# Altium PCB Jlink-OB.PcbDoc
Units mm, origin at the board's own origin, x right, y up, seen from the top; angles counter-clockwise.
Board outline 43.05 x 18 mm, 2 copper layers (Top Layer, Bottom Layer); 27 components, 30 nets, 129 pads, 22 vias.
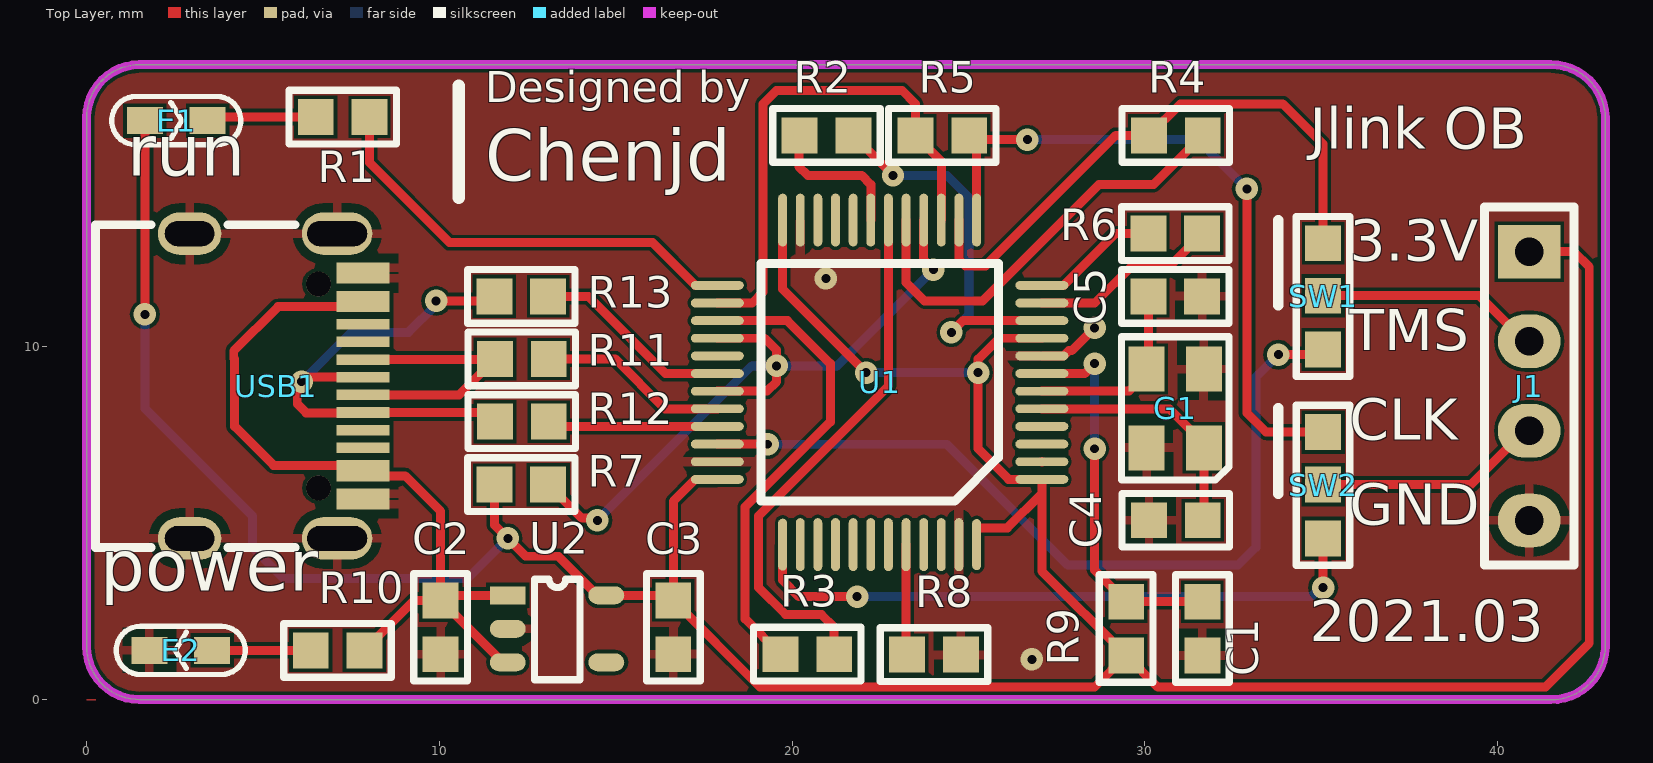
[diagram p0: Top Layer view]
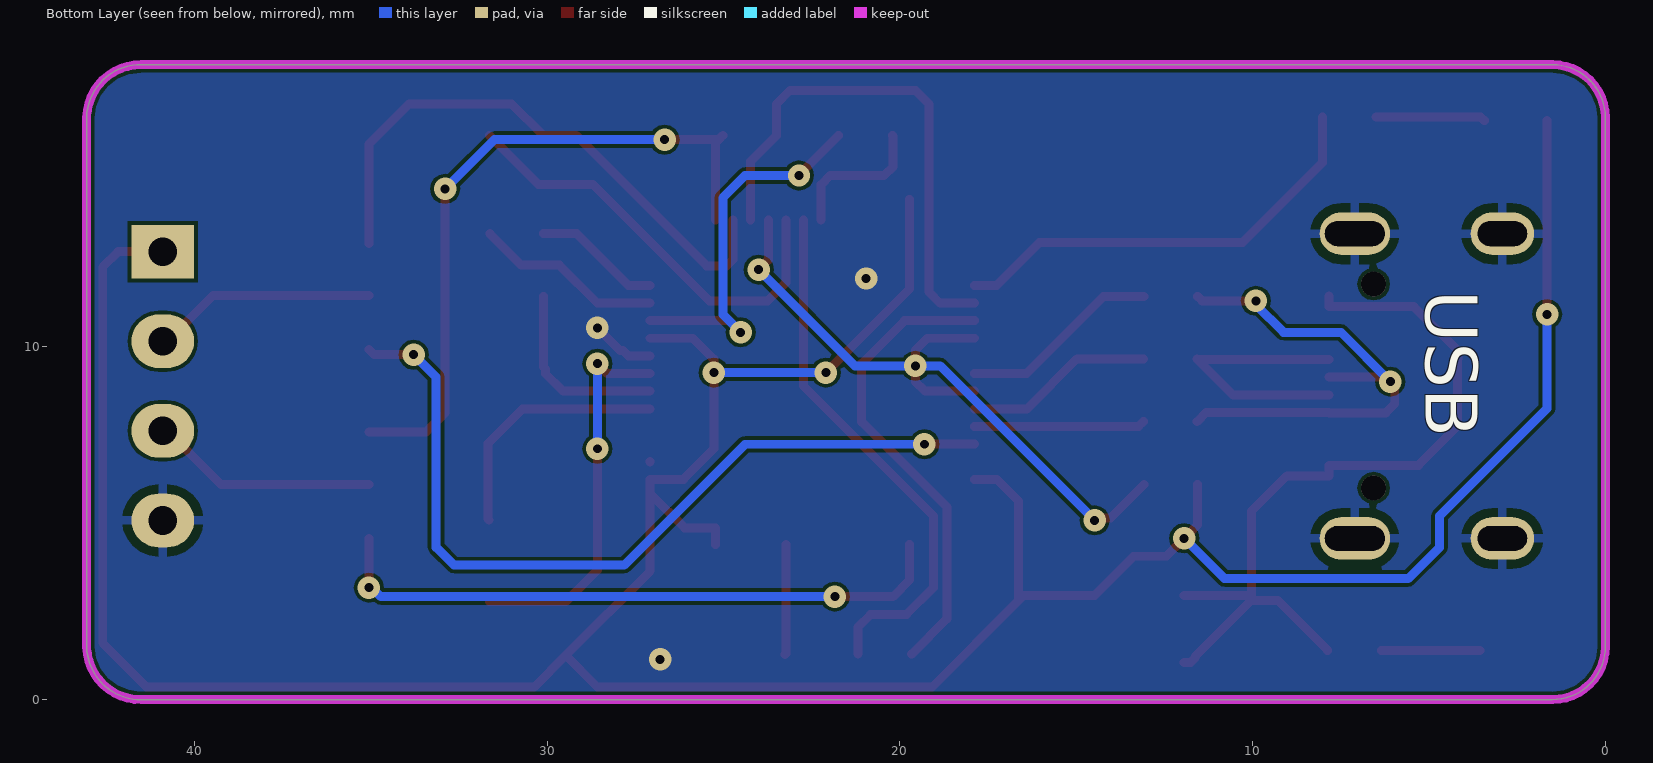
[diagram p1: Bottom Layer view, seen from below]
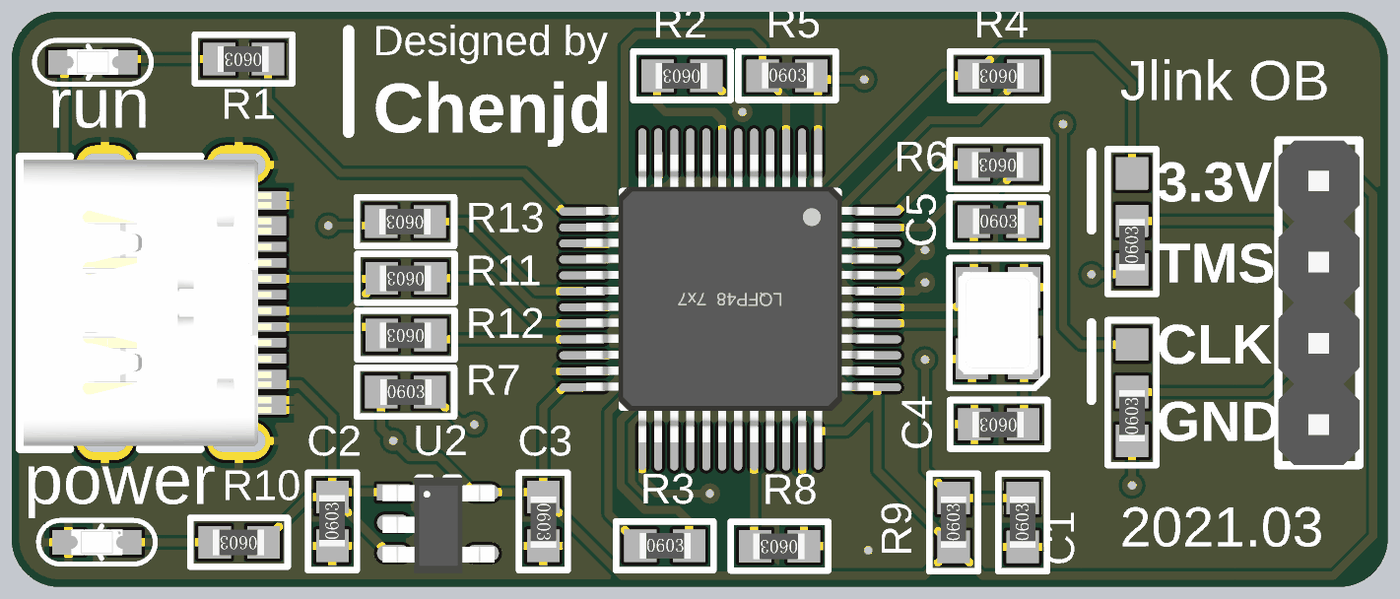
[diagram p2: 3D render of the assembled board from above, using the file's embedded part models]

## Layer stack, top to bottom
Top Solder: solder mask 0.0102, Solder Resist, Dk 3.5
Top Layer: signal copper 0.0356
Dielectric 1: dielectric 0.32, FR-4, Dk 4.8
Bottom Layer: signal copper 0.0356
Bottom Solder: solder mask 0.0102, Solder Resist, Dk 3.5

## Board outline
0,1.5 ccw(c1.5,1.5) 1.5,0 41.5,0 ccw(c41.526,1.526) 43.053,1.5 43.053,16.5 ccw(c41.527,16.474) 41.5,18 1.5,18 ccw(c1.5,16.5) 0,16.5

## Design rules (kind name [scope] priority, off if disabled: settings)
Clearance [All] p1: gap=0.1 ignorepadtopadclearanceinfootprint=FALSE
PolygonConnect [All] p1: connectstyle=Relief reliefconductorwidth=0.254 reliefentries=4 polygonreliefangle="90 Angle" airgapwidth=0.254
RoutingVias [All] p1: holewidth=0.711 width=1.27 viastyle="Through Hole" minholewidth=0.711 minwidth=1.27 maxholewidth=0.711 maxwidth=1.27
SolderMaskExpansion [All] p1: expansion=0.102 istentingtop=FALSE
Width [All] p1: maxlimit=0.254 minlimit=0.254 preferedwidth=0.254
30 further rules are at their usual default settings.

## Components (designator, comment, footprint, x,y, rotation, side; value= is the part's Value field where it differs from the comment)
C1 "0.1uF" 0603 31.623,1.27 r90 top
C2 "10uF" 0603 10.027,1.305 r90 top
C3 "10uF" 0603 16.637,2.794 r270 top
C4 "18PF" 0603 31.623,5.08 r180 top
C5 "18PF" 0603 30.116,11.436 r0 top
E1 "LED" LED_0603L 1.397,16.414 r0 top
E2 "LED" LED_0603L 3.81,1.397 r180 top
G1 "8MHz(无源贴片)" G3225 30.861,8.255 r90 top
J1 "Pin HDR1X4" "Pin HDR1X4/2.54mm-S" 40.894,12.7 r0 top locked
R1 "680R" 0603 8.001,16.51 r180 top
R2 "100R" 0603 21.717,15.99 r180 top
R3 "100R" 0603 19.685,1.293 r0 top
R4 "100R" 0603 31.623,15.99 r180 top
R5 "100R" 0603 23.512,16.002 r0 top
R6 "100R" 0603 31.606,13.204 r180 top
R7 "10K" 0603 11.574,6.102 r0 top
R8 "10K" 0603 24.765,1.27 r180 top
R9 "10K" 0603 29.464,1.27 r90 top
R10 "1K" 0603 7.857,1.391 r180 top
R11 "22R" 0603 13.081,9.652 r180 top
R12 "22R" 0603 13.081,7.874 r180 top
R13 "1K5" 0603 13.064,11.424 r180 top
SW1 "SW-oneoftwo" SW-oneoftwo-0603 35.046,11.43 r90 top
SW2 "SW-oneoftwo" SW-oneoftwo-0603 35.046,6.076 r90 top
U1 "STM32F103" LQFP-48 22.479,9.017 r180 top
U2 "SPX3819" SOT-23-5 11.938,2.957 r0 top
USB1 "KH-TYPE-C-16P" USB-C-16P 5.334,8.89 r270 top

## Footprints (in the part's own frame and the unit in brackets; to place one, negate y for a bottom-side part, rotate by r counter-clockwise, add the part's x,y. Pads: shape width x height; smd on the part's side, far side on the other; paste and mask are expansions set on the pad)
0603 [mil] "0603封装"
  rect 40x40 smd: 1(-0.68,-0.23) 2(59.32,-0.23)
  silkscreen extent -31,-30 89,30, body extent -1,-16 62,16, height 18
G3225 [mil] "3225贴片晶振"
  rect 50x40 smd: 1(-44,-32) 2(44,-32) 3(44,32) 4(-44,32)
  silkscreen extent -80,-60 80,60, body extent -63,-49 63,49, height 32
LED_0603L [mil] "LED"
  rect 40x30 smd: 1(10,0) 2(80,0)
  silkscreen extent -27,-27 117,27, body extent 14,-16 77,16, height 24
LQFP-48 [mm] "GD105"
  oval 1.5x0.25 smd: 1(-4.6,2.773) 2(-4.6,2.273) 3(-4.6,1.773) 4(-4.6,1.273) 5(-4.6,0.773) 6(-4.6,0.273) 7(-4.6,-0.227) 8(-4.6,-0.727) 9(-4.6,-1.227) 10(-4.6,-1.727) 11(-4.6,-2.227) 12(-4.6,-2.727) 25(4.6,-2.727) 26(4.6,-2.227) 27(4.6,-1.727) 28(4.6,-1.227) 29(4.6,-0.727) 30(4.6,-0.227) 31(4.6,0.273) 32(4.6,0.773) 33(4.6,1.273) 34(4.6,1.773) 35(4.6,2.273) 36(4.6,2.773)
  oval 0.25x1.5 smd: 13(-2.75,-4.577) 14(-2.25,-4.577) 15(-1.75,-4.577) 16(-1.25,-4.577) 17(-0.75,-4.577) 18(-0.25,-4.577) 19(0.25,-4.577) 20(0.75,-4.577) 21(1.25,-4.577) 22(1.75,-4.577) 23(2.25,-4.577) 24(2.75,-4.577) 38(2.25,4.623) 39(1.75,4.623) 40(1.25,4.623) 41(0.75,4.623) 42(0.25,4.623) 43(-0.25,4.623) 44(-0.75,4.623) 45(-1.25,4.623) 46(-1.75,4.623) 47(-2.25,4.623)
  oval 0.25x1.473 smd: 37(2.75,4.623)
  oval 0.25x1.448 smd: 48(-2.75,4.623)
  silkscreen extent -3.37,-3.34 3.36,3.39, body extent -4.5,-4.5 4.5,4.5, height 1.45
"Pin HDR1X4/2.54mm-S" [mil]
  rect 70x60 hole 32: 1(0,0)
  oval 70x60 hole 32: 2(0,-100) 3(0,-200) 4(0,-300)
  silkscreen extent -50,-350 50,50, body extent -50,-350 50,50, height 336
SOT-23-5 [mil] "SPX3819"
  rect 40x20 smd: 1(0,0)
  oval 40x20 smd: 2(0,-37.4) 3(0,-74.8) 4(110,-74.8) 5(110,0)
  silkscreen extent 30,-94 81,18, body extent -13,-100 125,18, height 43
SW-oneoftwo-0603 [mil] "二选一电阻开关0603"
  rect 40x40 smd: 1(0.81,-0.24) 2(59.32,-0.23) 3(-59.19,-0.24)
  silkscreen extent -89,-30 89,30, body extent -60,-16 3,16, height 18
USB-C-16P [mm] "USB Type-c 16P"
  oval 1.2x2 hole 0.7 slot 1.7 at 90 deg: 1(-4.32,1.765) 2(4.32,1.765)
  oval 1.2x1.8 hole 0.7 slot 1.4 at 90 deg: 3(-4.32,-2.415) 4(4.32,-2.415)
  rect 0.3x1.5 smd: A1(-3.35,2.5) A4(-2.55,2.5) A5(-1.25,2.5) A6(-0.25,2.5) A7(0.25,2.5) A8(1.25,2.5) A9(2.55,2.5) A12(3.35,2.5) B1(3.05,2.5) B4(2.25,2.5) B5(1.75,2.5) B6(0.75,2.5) B7(-0.75,2.5) B8(-1.75,2.5) B9(-2.25,2.5) B12(-3.05,2.5)
  round 0.7 hole 0.7 unplated: ""(-2.89,1.235) ""(2.89,1.235)
  silkscreen extent -4.57,-5.08 4.57,0.57, body extent -4.48,-4.96 4.48,2.79, height 3.26

## Part data
C1 C2 C3 C4 C5: library part "CAP Nonpolarity", "无极电容"
E1 E2: "LED灯"
G1: library part MM-11B, "无源晶振MCU使用"
R1 R2 R3 R4 R5 R6 R7 R8 R9 R10 R11 R12 R13: library part R, "电阻"
SW1 SW2: "二选一电阻开关"
U1: "STM32F103C8T6", ComponentLink1Description="Manufacturer Link", ComponentLink1URL=www.st.com/stm32, ComponentLink2Description=Datasheet, ComponentLink2URL=http://www.st.com/stonline/products/literature/ds/13587.pdf, DatasheetVersion="rev6, Mar-2008", PackageDescription="48-Pin Low-Profile Quad Flat Pack, 7 x 7 mm Body, 0.5 mm Pitch (LQFP48)", PackageReference=LQFP48, PackageVersion=Mar-2008, Published=30-May-2008, Publisher="Altium Limited"
U2: "稳压器"
USB1: library part "USB-TYPE-C 16P", BOM_Manufacturer="Shenzhen Kinghelm Elec", BOM_Manufacturer Part=KH-TYPE-C-16P, BOM_Supplier=LCSC, BOM_Supplier Part=C709357, Contributor=LCSC, spicePre=U, spiceSymbolName=KH-TYPE-C-16P

## Via types
v1: diameter 0.635, hole 0.254, Top Layer to Bottom Layer, tented both sides, 22 vias

## Nets (pads, with @x,y where several pads share a name; then routed paths per layer and width w, separated by ;. In a path a pad name is that pad's centre, name@x,y a point inside that pad or via, vN(x,y) a via of type N, cw(c..) or ccw(c..) an arc to the next point about the centre after c; other vN are vias at no path point)
+5: C2.2 R10.1 U2.1 U2.3 USB1.A4 USB1.A9 USB1.B4 USB1.B9 | length 23.5
  Top Layer w0.254: USB1.A4 USB1.B9 5.425,11.14 4.169,9.884 4.169,9.674 4.191,9.652 4.191,7.747 5.298,6.64 USB1.B4 USB1.A9 9.027,6.34 10.033,5.334 C2.2 ; R10.1 9.288,2.811 C2.2 ; U2.3 11.753,1.057 11.635,1.174 11.635,1.209 C2.2 ; U2.1 10.178,2.957 C2.2
D+: R12.1 U1.33 | length 4.8
  Top Layer w0.254: R12.1 13.234,7.744 U1.33
D-: R11.1 U1.32 | length 5.4
  Top Layer w0.254: R11.1 14.98,9.658 16.394,8.244 U1.32
GND: C1.1 C2.1 C3.2 C4.2 C5.2 E2.2 G1.2 G1.4 J1.4 R8.1 U1.8 U1.23 U1.35 U1.47 U2.2 USB1.1 USB1.2 USB1.3 USB1.4 USB1.A1 USB1.A12 USB1.B1 USB1.B12 | length 1.8
  Top Layer w0.254: U1.8 27.7,9.744 27.848,9.892 27.926,9.892 v1(28.575,10.541)
  other v1: 26.797,1.143 20.955,11.938
JTCK: SW2.3 U1.37 | length 18
  Top Layer w0.254: U1.37@19.731,4.392 U1.37 19.729,3.385 20.193,2.921 v1(21.844,2.921) ; v1(35.052,3.175) SW2.3
  Bottom Layer w0.254: v1(21.844,2.921) 34.713,2.921 34.967,3.175 v1(35.052,3.175)
JTMS: SW1.3 U1.34 | length 24
  Top Layer w0.254: U1.34 19.299,7.244 v1(19.304,7.239) ; v1(33.782,9.779) 34.905,9.779 SW1.3
  Bottom Layer w0.254: v1(19.304,7.239) 24.384,7.239 27.813,3.81 32.639,3.81 33.147,4.318 33.147,9.144 v1(33.782,9.779)
LED: R1.1 U1.25 | length 12.6
  Top Layer w0.254: R1.1 8.018,15.223 10.287,12.954 16.048,12.954 17.258,11.744 U1.25
NetC1_2: C1.2 R9.2 U1.7 | length 10.9
  Top Layer w0.254: U1.7 28.294,9.244 v1(28.575,9.525) ; v1(28.575,7.112) 28.575,3.672 R9.2 C1.2
  Bottom Layer w0.254: v1(28.575,7.112) v1(28.575,9.525)
NetE1_2: E1.2 R1.2 | length 3.1
  Top Layer w0.254: E1.2 3.531,16.516 R1.2
NetE2_1: E2.1 R10.2 | length 2.8
  Top Layer w0.254: E2.1 R10.2
NetJ1_2: J1.2 SW1.1 | length 6.4
  Top Layer w0.254: SW1.1 39.477,11.45 40.767,10.16 J1.2
NetJ1_3: J1.3 SW2.1 | length 6.5
  Top Layer w0.254: SW2.1 39.243,6.096 40.767,7.62 J1.3
NetR8_2: R8.2 U1.44 | length 3.1
  Top Layer w0.254: U1.44 23.229,1.305 R8.2
OSC_IN: C4.1 G1.1 U1.5 | length 7.2
  Top Layer w0.254: U1.5 30.694,8.244 31.674,7.264 G1.1 31.674,5.119 C4.1
OSC_OUT: C5.1 G1.3 U1.6 | length 5.4
  Top Layer w0.254: U1.6 29.547,8.744 30.048,9.246 G1.3 30.099,9.423 C5.1
rD+: R13.1 U1.30 | length 5.7
  Top Layer w0.254: R13.1 14.224,11.43 16.41,9.244 U1.30
TCK_I: R5.2 SW2.2 U1.13 | length 19.6
  Top Layer w0.254: R5.2 R5.2@25.14,15.875 ; U1.13 25.229,15.786 R5.2@25.14,15.875 ; v1(26.67,15.875) R5.2@25.14,15.875 ; v1(32.893,14.478) 32.893,8.128 33.439,7.582 SW2.2
  Bottom Layer w0.254: v1(26.67,15.875) 31.496,15.875 v1(32.893,14.478)
TCK_O: R5.1 U1.15 U1.26 | length 15
  Top Layer w0.254: U1.26 18.864,11.244 19.177,11.557 19.177,16.891 19.558,17.272 23.114,17.272 23.495,16.891 R5.1 24.229,15.262 U1.15
TDI_I: R3.2 U1.18 | length 15.3
  Top Layer w0.254: R3.2 21.192,2.049 20.828,2.413 19.812,2.413 19.05,3.175 19.05,5.207 22.729,8.886 U1.18
TDI_O: R3.1 U1.27 | length 13.4
  Top Layer w0.254: U1.27 19.863,10.744 21.082,9.525 21.082,7.874 18.669,5.461 18.669,2.286 R3.1
TDO_I: R7.2 U1.16 U1.28 U1.31 | length 20.3
  Top Layer w0.254: R7.2 14.024,5.153 14.405,5.153 v1(14.478,5.08) ; U1.31 19.285,8.744 19.558,9.017 v1(19.558,9.461) 19.558,9.906 19.22,10.244 U1.28 ; U1.16 23.729,12.466 v1(24.003,12.192)
  Bottom Layer w0.254: v1(14.478,5.08) 18.86,9.461 v1(19.558,9.461) 21.273,9.461 v1(24.003,12.192)
TMS_I: R4.2 SW1.2 U1.14 | length 16.7
  Top Layer w0.254: U1.14 24.729,12.482 24.914,12.297 25.475,12.297 29.174,15.996 R4.2 31.011,16.891 33.909,16.891 35.052,15.748 SW1.2
TMS_O: R4.1 U1.17 | length 12.3
  Top Layer w0.254: U1.17 23.229,11.823 23.749,11.303 25.4,11.303 28.702,14.605 30.249,14.605 R4.1
TRES_I: R6.2 U1.12 | length 3.6
  Top Layer w0.254: U1.12 27.7,11.744 29.164,13.208 30.097,13.208 R6.2
TRES_O: R6.1 U1.11 | length 5.4
  Top Layer w0.254: U1.11 28.576,11.244 29.651,12.319 30.732,12.319 R6.1
TRST_I: R2.2 U1.19 | length 4.1
  Top Layer w0.254: R2.2 20.193,15.979 20.193,15.113 20.447,14.859 21.971,14.859 22.229,14.601 U1.19
TRST_O: R2.1 U1.10 | length 10.8
  Top Layer w0.254: R2.1 22.86,14.87 v1(22.86,14.859) ; v1(24.511,10.414) 24.841,10.744 U1.10
  Bottom Layer w0.254: v1(22.86,14.859) 24.384,14.859 25.019,14.224 25.019,10.922 v1(24.511,10.414)
USB_N: R11.2 USB1.A7 USB1.B7 | length 7.9
  Top Layer w0.254: USB1.A7 10.556,8.64 R11.2@11.556,9.64 ; USB1.B7 R11.2@11.556,9.64 ; R11.2 R11.2@11.556,9.64
USB_P: R12.2 R13.2 USB1.A6 USB1.B6 | length 14.8
  Top Layer w0.254: USB1.A6 6.219,9.14 v1(6.094,9.015) 5.969,8.89 5.969,8.382 6.223,8.128 7.822,8.128 USB1.B6 11.314,8.14 R12.2 ; v1(9.906,11.303) 11.43,11.303 R13.2
  Bottom Layer w0.254: v1(6.094,9.015) 7.493,10.414 9.12,10.414 9.906,11.2 v1(9.906,11.303)
V3.3: C3.1 E1.1 J1.1 R7.1 R9.1 U1.1 U1.9 U1.24 U1.36 U1.48 U2.5 | length 98.2
  Top Layer w0.254: v1(1.651,10.922) E1.1 ; R7.1 11.557,4.953 12.446,4.064 13.371,4.064 14.478,2.957 U2.5 16.486,2.957 C3.1 ; U1.36 17.258,6.244 16.631,5.617 C3.1 ; U1.24@19.727,14.182 19.729,14.18 U1.24 19.729,11.64 v1(22.098,9.271) ; U1.48 25.229,4.864 25.231,4.866 26.103,4.866 27.079,5.842 ; U1.9 25.865,10.244 25.273,9.652 25.273,7.112 26.139,6.246 27.077,6.246 U1.1 27.079,5.842 ; J1.1 42.164,12.7 42.598,12.266 42.598,1.598 41.353,0.354 30.369,0.354 R9.1 ; C3.1 19.088,0.354 28.571,0.354 R9.1 ; 27.079,5.842 27.079,3.643 R9.1
  Bottom Layer w0.254: v1(1.651,10.922) 1.651,8.255 4.699,5.207 4.699,4.318 5.588,3.429 10.795,3.429 v1(11.938,4.572) ; v1(22.098,9.271) v1(25.273,9.271)
pads on no net: U1.2 U1.3 U1.4 U1.20 U1.21 U1.22 U1.29 U1.38 U1.39 U1.40 U1.41 U1.42 U1.43 U1.45 U1.46 U2.4 USB1. USB1.A5 USB1.A8 USB1.B5 USB1.B8
copper on no net: | length 0
  Top Layer w0.254: 27.079,6.744 27.081,6.742

## Polygon pours and split planes (outlines as drawn)
GND on Bottom Layer "GND_L02_P007" (solid, remove dead copper, pour order 7): 0,0 43.053,0 43.053,18.034 0,18.034
no net on Bottom Layer "NONET_L02_P002" (solid, remove dead copper, pour order 2): 0,18.034
GND on Top Layer "GND_L01_P008" (solid, remove dead copper, pour order 8): 0,0 43.053,0 43.053,18.034 41.534,18.034 41.5,18 41.466,18.034 0,18.034
no net on Top Layer "NONET_L01_P006" (solid, remove dead copper, pour order 6): 0,0 0.254,0
no net on Top Layer "NONET_L01_P003" (solid, remove dead copper, pour order 3): 0,0 0.254,0

## Keep-outs
Keep-Out Layer:
  the board outline again, w0.254

## Silkscreen, mask and mechanical layers (free items; w line width, h text height)
Top Overlay:
  lines w0.3: 33.782,5.842 33.782,8.255 ; 33.782,11.176 33.782,13.589
  lines w0.354: 10.541,14.224 10.541,17.399
  text "Designed by" at 11.303,16.637 h1.5
  text "Jlink OB" at 34.671,15.24 h2
  text "run" at 1.143,14.376 h2.5
  text "Chenjd" at 11.303,14.224 h2.5
  text "3.3V" at 35.814,12.065 h2
  text "TMS" at 35.814,9.525 h2
  text "CLK" at 35.814,6.985 h2
  text "GND" at 35.814,4.572 h2
  text "power" at 0.381,2.603 h2.5
  text "2021.03" at 34.673,1.27 h2
Bottom Overlay:
  text "USB" at 5.588,11.608 h2.54 r90